# EAGLE board Madeline (EAGLE 5.07)
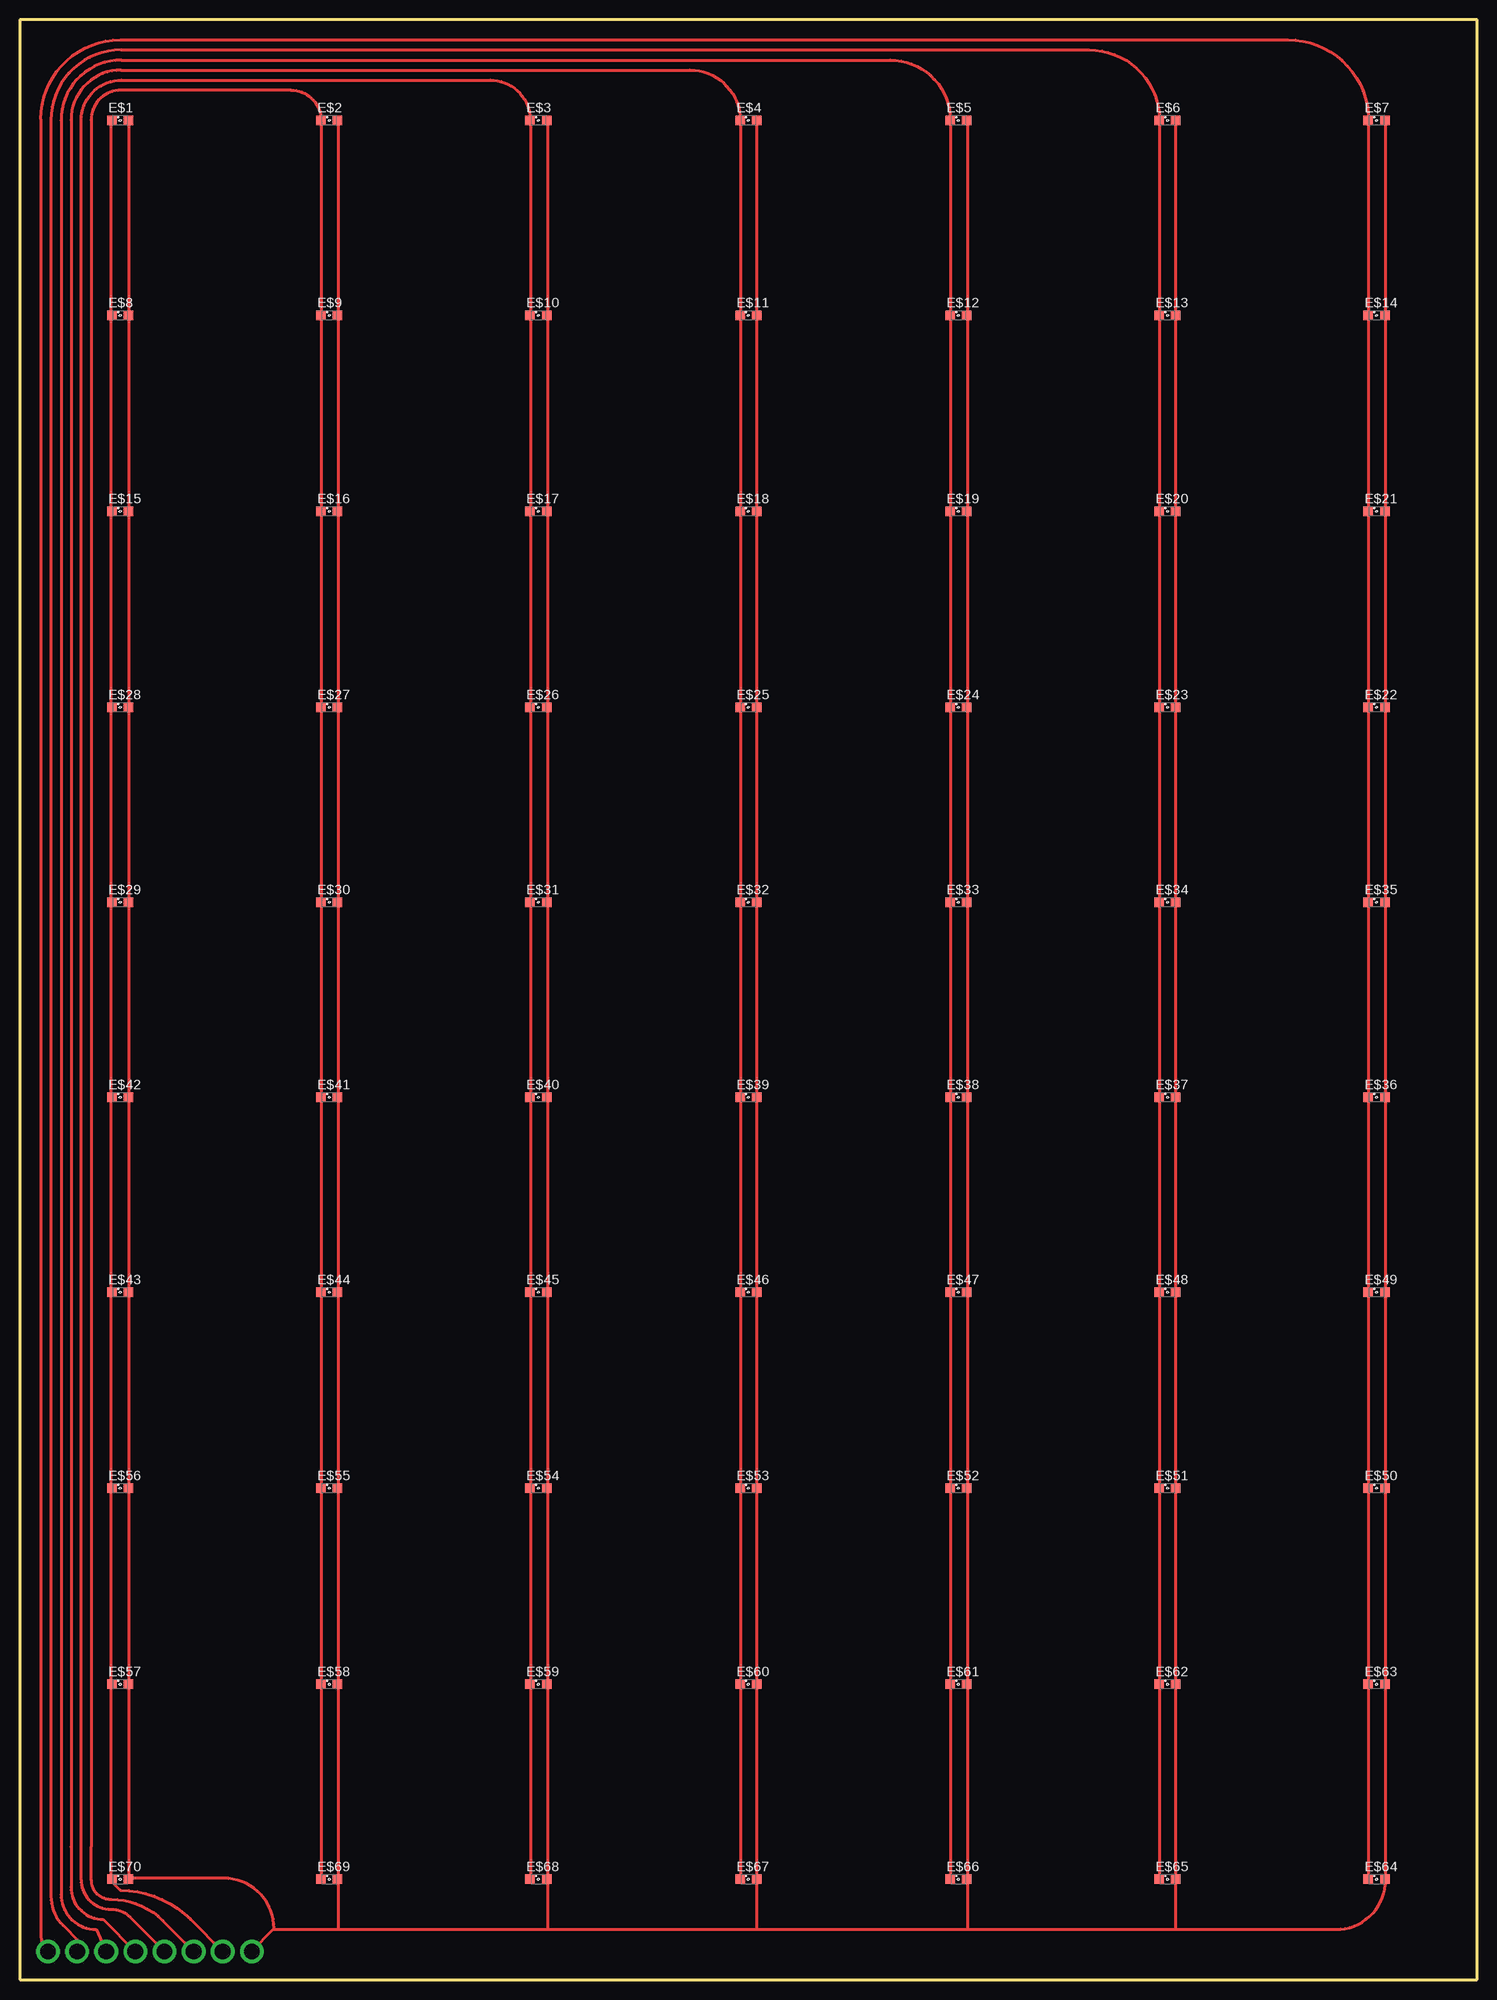
[diagram p0: board, top side]

Size 184.15 x 247.65 mm. Coordinates in mm from the lower left corner, seen from the top.
Outline: 0,0 184.15,0 184.15,247.65 0,247.65 0,0
Copper layers (1*16): Top 0.035mm / dielectric 1.5mm / Bottom 0.035mm
Design rules "default": minimum track width 10mil, minimum drill 24mil, track to track 8mil, track to pad 8mil, pad to pad 8mil, via to via 8mil, smd to smd 8mil, copper to edge 40mil, drill to drill 8mil, minimum pad ring 10mil, minimum via ring 8mil, stop-mask expansion 4mil, vias tented up to drill 0mil, thermal gap 10mil

## Footprints (pad centres in the part's own frame; a part is rotated, then mirrored left to right if it is on the bottom)
SML0805 = smd 1.2 x 1.2: A 1.05,0; C -1.05,0

## Placement (x,y rotation side)
E$1  [SML0805]  12.7,234.95 0 top
E$2  [SML0805]  39.12,234.95 0 top
E$3  [SML0805]  65.53,234.95 0 top
E$4  [SML0805]  92.08,234.95 0 top
E$5  [SML0805]  118.62,234.95 0 top
E$6  [SML0805]  145.03,234.95 0 top
E$7  [SML0805]  171.45,234.95 0 top
E$8  [SML0805]  12.7,210.31 0 top
E$9  [SML0805]  39.12,210.31 0 top
E$10  [SML0805]  65.53,210.31 0 top
E$11  [SML0805]  92.08,210.31 0 top
E$12  [SML0805]  118.62,210.31 0 top
E$13  [SML0805]  145.03,210.31 0 top
E$14  [SML0805]  171.45,210.31 0 top
E$15  [SML0805]  12.7,185.55 0 top
E$16  [SML0805]  39.12,185.55 0 top
E$17  [SML0805]  65.53,185.55 0 top
E$18  [SML0805]  92.08,185.55 0 top
E$19  [SML0805]  118.62,185.55 0 top
E$20  [SML0805]  145.03,185.55 0 top
E$21  [SML0805]  171.45,185.55 0 top
E$22  [SML0805]  171.45,160.78 0 top
E$23  [SML0805]  145.03,160.78 0 top
E$24  [SML0805]  118.62,160.78 0 top
E$25  [SML0805]  92.08,160.78 0 top
E$26  [SML0805]  65.53,160.78 0 top
E$27  [SML0805]  39.12,160.78 0 top
E$28  [SML0805]  12.7,160.78 0 top
E$29  [SML0805]  12.7,136.14 0 top
E$30  [SML0805]  39.12,136.14 0 top
E$31  [SML0805]  65.53,136.14 0 top
E$32  [SML0805]  92.08,136.14 0 top
E$33  [SML0805]  118.62,136.14 0 top
E$34  [SML0805]  145.03,136.14 0 top
E$35  [SML0805]  171.45,136.14 0 top
E$36  [SML0805]  171.45,111.51 0 top
E$37  [SML0805]  145.03,111.51 0 top
E$38  [SML0805]  118.62,111.51 0 top
E$39  [SML0805]  92.08,111.51 0 top
E$40  [SML0805]  65.53,111.51 0 top
E$41  [SML0805]  39.12,111.51 0 top
E$42  [SML0805]  12.7,111.51 0 top
E$43  [SML0805]  12.7,86.87 0 top
E$44  [SML0805]  39.12,86.87 0 top
E$45  [SML0805]  65.53,86.87 0 top
E$46  [SML0805]  92.08,86.87 0 top
E$47  [SML0805]  118.62,86.87 0 top
E$48  [SML0805]  145.03,86.87 0 top
E$49  [SML0805]  171.45,86.87 0 top
E$50  [SML0805]  171.45,62.1 0 top
E$51  [SML0805]  145.03,62.1 0 top
E$52  [SML0805]  118.62,62.1 0 top
E$53  [SML0805]  92.08,62.1 0 top
E$54  [SML0805]  65.53,62.1 0 top
E$55  [SML0805]  39.12,62.1 0 top
E$56  [SML0805]  12.7,62.1 0 top
E$57  [SML0805]  12.7,37.34 0 top
E$58  [SML0805]  39.12,37.34 0 top
E$59  [SML0805]  65.53,37.34 0 top
E$60  [SML0805]  92.08,37.34 0 top
E$61  [SML0805]  118.62,37.34 0 top
E$62  [SML0805]  145.03,37.34 0 top
E$63  [SML0805]  171.45,37.34 0 top
E$64  [SML0805]  171.45,12.7 0 top
E$65  [SML0805]  145.03,12.7 0 top
E$66  [SML0805]  118.62,12.7 0 top
E$67  [SML0805]  92.08,12.7 0 top
E$68  [SML0805]  65.53,12.7 0 top
E$69  [SML0805]  39.12,12.7 0 top
E$70  [SML0805]  12.7,12.7 0 top

## Library data of the parts
E$1-E$70 = led

## Tracks (layer width: path | path; a pad name or v marks a point on that pad's centre or on a via)
S$1
  Top 0.406: 11.56,12.65 11.56,234.95
S$2
  Top 0.406: 40.26,234.95 40.26,6.35
S$3
  Top 0.406: 66.67,234.95 66.67,6.35
S$4
  Top 0.406: 93.09,234.95 93.09,6.35
S$5
  Top 0.406: 119.76,234.95 119.76,6.35
S$6
  Top 0.406: 146.05,234.95 146.05,6.35
S$7
  Top 0.406: 172.59,234.95 172.59,12.6 arc-90 166.34,6.35 32,6.35 29.34,3.68
S$8  (via drill 2)
  Top 0.406: 11.56,10.16 arc-45 18.06,7.47 v21.97,3.56
S$9  (via drill 2)
  other vias: 7.24,3.56
S$11
  Top 0.406: 3.94,19.56 3.94,10.54 arc45 5.46,6.86 7.37,4.95 7.37,3.43
S$12  (via drill 2)
  Top 0.406: 11.56,12.57 11.56,12.45 12.7,11.3 arc-45 21.59,7.62 v25.65,3.56
S$13  (via drill 2)
  Top 0.406: 11.56,8.89 arc-45 13.94,7.9 v18.29,3.56
S$15
  Top 0.406: 38.23,12.7 38.1,12.7 38.1,234.92 arc90 34.26,238.76 12.77,238.76 arc90 9.02,235.01 9.02,16.77
S$16
  Top 0.406: 64.52,12.7 64.52,234.97 arc90 59.46,240.03 12.86,240.03 arc90 7.75,234.92 7.75,12.64 arc90 11.5,8.89
S$17
  Top 0.406: 91.06,12.7 91.06,234.93 arc90 84.69,241.3 12.78,241.3 arc90 6.48,235 6.48,16.81
S$18  (via drill 2)
  Top 0.406: 117.47,12.7 117.6,12.7 117.6,234.95 arc90 109.98,242.57 12.82,242.57 arc90 5.21,234.96 5.21,10.79 arc90 9.65,6.35 v10.92,3.56
S$19
  Top 0.406: 144.02,234.95 143.89,234.95 | 144.02,234.95 144.02,12.7 | 3.94,19.18 3.94,234.98 arc-90 12.8,243.84 135.13,243.84 arc-90 144.02,234.95
S$20
  Top 0.406: 2.67,235.08 arc-90 12.7,245.11 160.27,245.11 arc-90 170.43,234.95 170.43,12.7
S$22  (via drill 2)
  other vias: 29.34,3.56
S$23
  Top 0.406: 13.84,12.83 13.84,235.08
S$24
  Top 0.406: 32.13,6.48 arc90 25.78,12.83 13.97,12.83 13.84,12.7
S$25  (via drill 2)
  Top 0.406: 2.67,234.95 2.67,5.7 arc45 v3.56,3.56
S$26
  Top 0.406: 9.02,16.76 9.02,12.6 arc90 11.46,10.16
S$27  (via drill 2)
  Top 0.406: 6.48,16.76 6.48,11.68 arc90 10.54,7.62 v14.61,3.56